# EAGLE board TinyNES_Enclosure_Top_RGB (EAGLE 9.6.2)
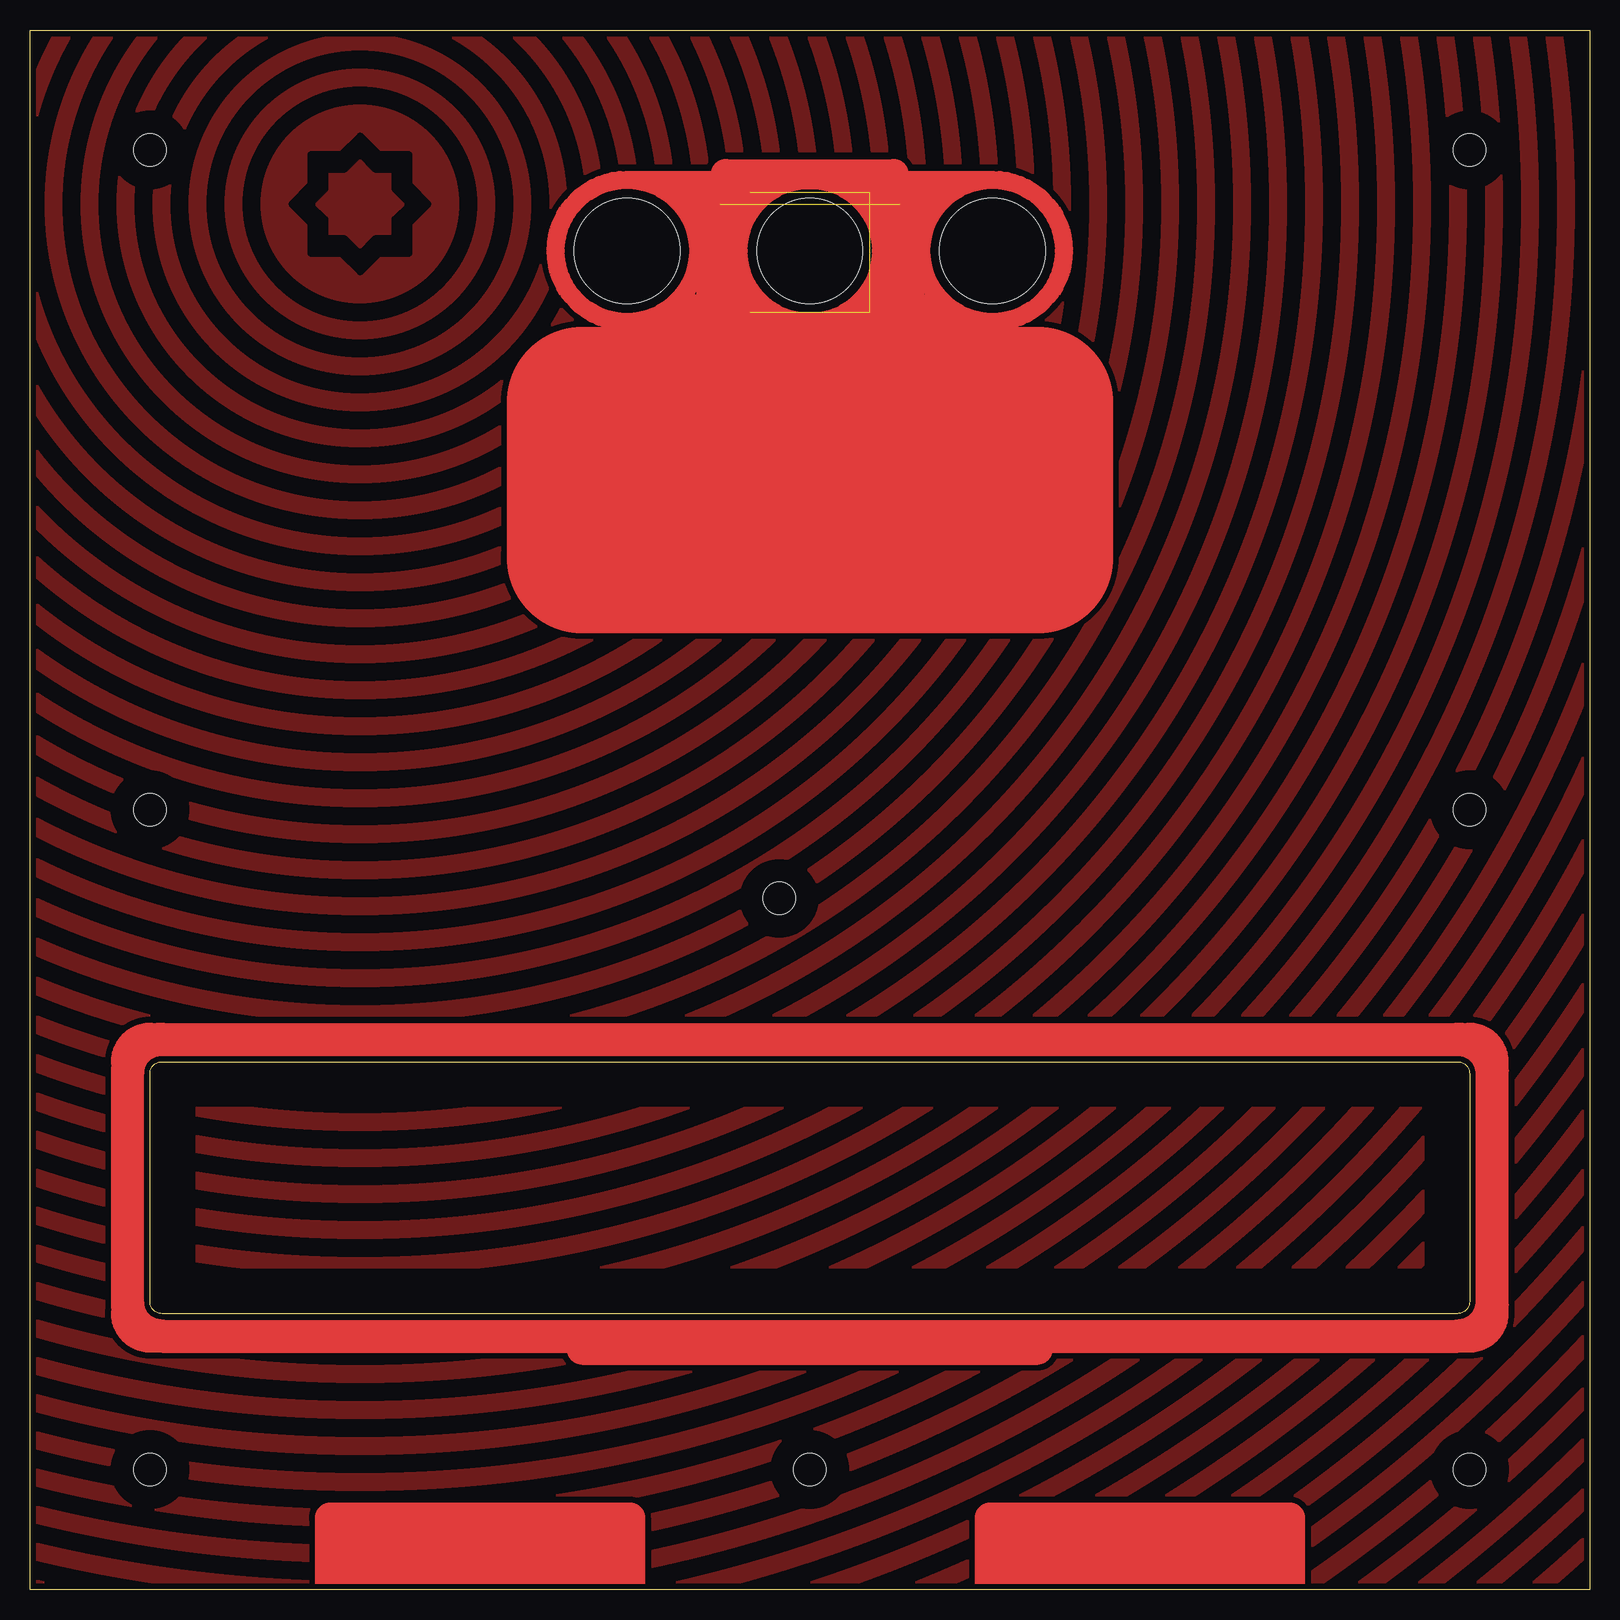
[diagram p0: board, top side]
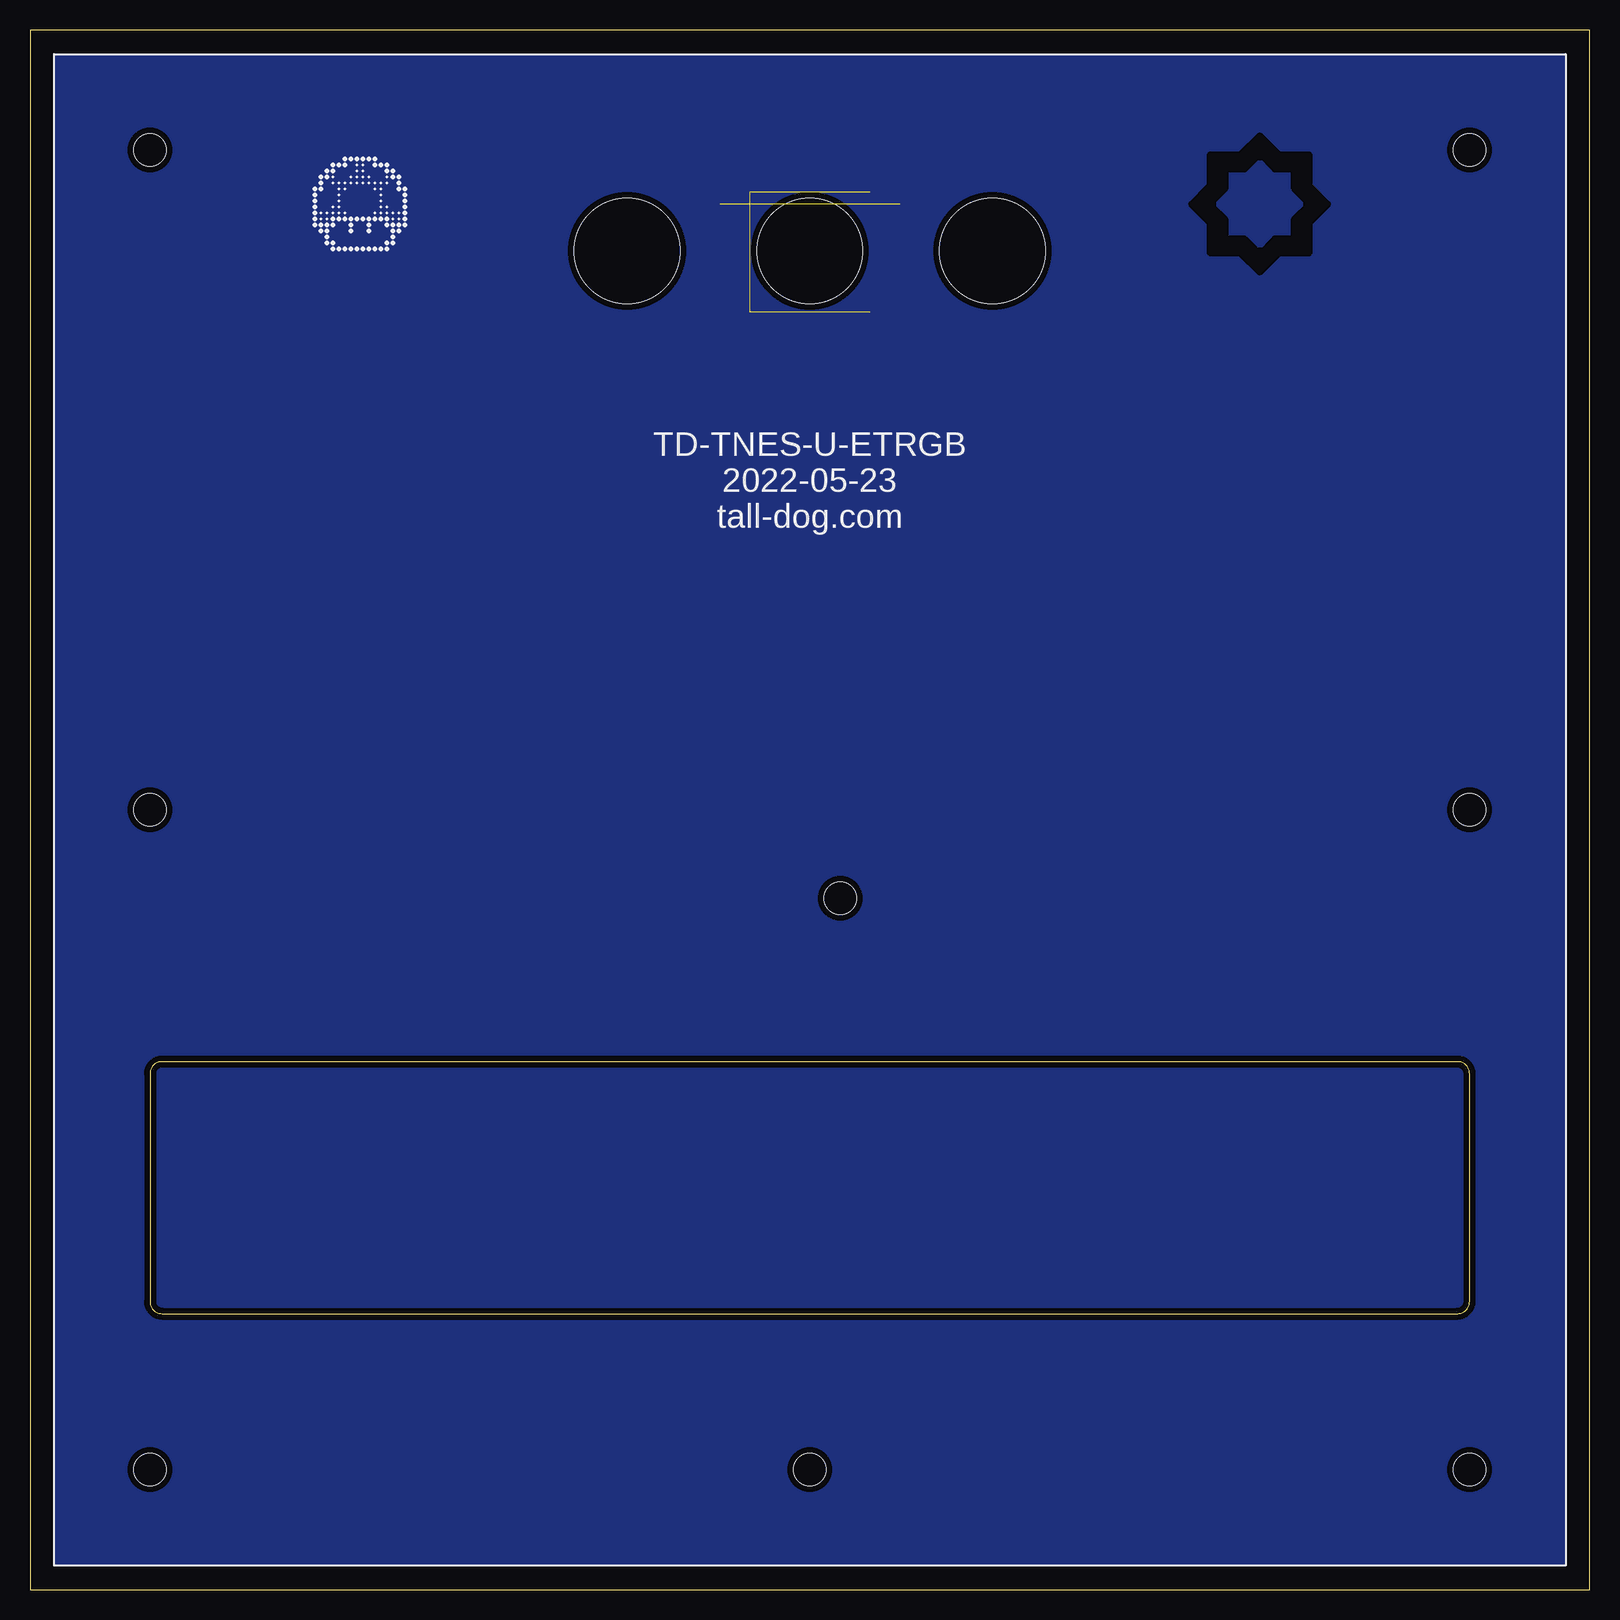
[diagram p1: board, bottom side, seen from below]

Size 130 x 130 mm. Coordinates in mm from the lower left corner, seen from the top.
Outline: 130,130 130,0 0,0 0,130 130,130
Outline: 119,23 11,23 arc-90 10,24 10,43 arc-90 11,44 119,44 arc-90 120,43 120,24 arc-90 119,23
Copper layers (1*16): Top 0.035mm / dielectric 1.5mm / Bottom 0.035mm
Design rules "default *": minimum track width 6mil, minimum drill 0.35mm, track to track 6mil, track to pad 6mil, pad to pad 6mil, via to via 6mil, smd to smd 6mil, copper to edge 20mil, drill to drill 6mil, minimum pad ring 10mil, minimum via ring 8mil, stop-mask expansion 0mil, vias tented up to drill 0mil, thermal gap 10mil
Holes 8.8 mm at 65,111.58 49.76,111.58 80.24,111.58
tRestrict: area 15.5,103.5 to 39.5,127.5; area 12.5,100.5 to 42.5,130.5; area 9.5,97.5 to 45.5,133.5; area 6.5,94.5 to 48.5,136.5; area -2.5,85.5 to 57.5,145.5; area 0.5,88.5 to 54.5,142.5; area 3.5,91.5 to 51.5,139.5; area -17.5,70.5 to 72.5,160.5; area -14.5,73.5 to 69.5,157.5; area -11.5,76.5 to 66.5,154.5; area -8.5,79.5 to 63.5,151.5; area -5.5,82.5 to 60.5,148.5; 44 more areas; 19 lines

## Footprints (pad centres in the part's own frame; a part is rotated, then mirrored left to right if it is on the bottom)
_COUNTERSINK-M2.5-TOP = hole 2.7: 0,0

## Placement (x,y rotation side)
E$1  [_ENCLOSURE-POWER-STAR]  27.5,115.5 0 top
E$2  [_COUNTERSINK-M2.5-TOP]  120,10 0 top
E$3  [_COUNTERSINK-M2.5-TOP]  65,10 0 top
E$4  [_COUNTERSINK-M2.5-TOP]  10,10 0 top
E$5  [_COUNTERSINK-M2.5-TOP]  10,65 0 top
E$6  [_COUNTERSINK-M2.5-TOP]  10,120 0 top
E$7  [_COUNTERSINK-M2.5-TOP]  120,120 0 top
E$8  [_COUNTERSINK-M2.5-TOP]  120,65 0 top
E$9  [_COUNTERSINK-M2.5-TOP]  62.46,57.61 0 top
E$10  [_PIXEL-ART-1UP]  102.5,115.5 0 bottom

## Library data of the parts
E$1-E$10 = TinyNES_Library

## Tracks (layer width: path | path; a pad name or v marks a point on that pad's centre or on a via)
GND
  pour Bottom (isolate 0.254): 127.75,2.25 2.25,2.25 2.25,127.75 127.75,127.75
  pour Top (isolate 0.254): 130,0 0,0 0,130 130,130
RGB
  Top 1.5: 80.24,117.52 arc-180 80.24,105.65 | 49.76,105.65 arc-180 49.76,117.52 | 49.76,117.52 65,117.52 | 65,117.52 80.24,117.52 | 49.76,105.65 65,105.65 | 65,105.65 80.24,105.65 | 65,105.65 arc-180 65,117.52 | 80.24,105.65 arc-180 80.24,117.52 | 65,117.52 arc-180 65,105.65 | 49.76,117.52 arc-180 49.76,105.65
  Top 2.5: 57.98,118 71.98,118
S$1  (1 unrouted)
  Top 4: 57.5,115.5 57.5,107 | 72.5,115.5 72.5,107
S$2  (3 unrouted)
  Top 3: 55,116.5 60,116.5 | 55,106.5 60,106.5 | 70,106.5 75,106.5 | 70,116.5 75,116.5
SLOT
  Top 2.5: 46,20 84,20
  Top 2.75: 8.12,43 arc-90 11,45.88 | 11,21.12 arc-90 8.12,24 | 121.88,24 arc-90 119,21.12 | 119,45.88 arc-90 121.88,43 | 11,45.88 119,45.88 | 11,21.12 119,21.12 | 121.88,24 121.88,43 | 8.12,24 8.12,43 | 119,45.88 120,45.88 arc-90 121.88,44 121.88,43 | 121.88,24 121.88,23 arc-90 120,21.12 119,21.12 | 11,21.12 10,21.12 arc-90 8.12,23 8.12,24 | 8.12,43 8.12,44 arc-90 10,45.88 11,45.88
(copper drawn outside any net)
  shapes: Top area x7, Top circle x8

## Text on the board
bPlace: TD-TNES-U-ETRGB / 2022-05-23 / tall-dog.com
tStop: RGB VIDEO | TinyNES | CART LABEL FACES THIS SIDE | PLAYER ONE | PLAYER TWO